# Altium PCB Signal Turn YBR Front.PcbDoc
Units mm, origin at the board's own origin, x right, y up, seen from the top; angles counter-clockwise.
Board outline 152.4 x 101.6 mm, 2 copper layers (Top Layer, Bottom Layer); 12 components, 11 nets, 24 pads, 6 vias.
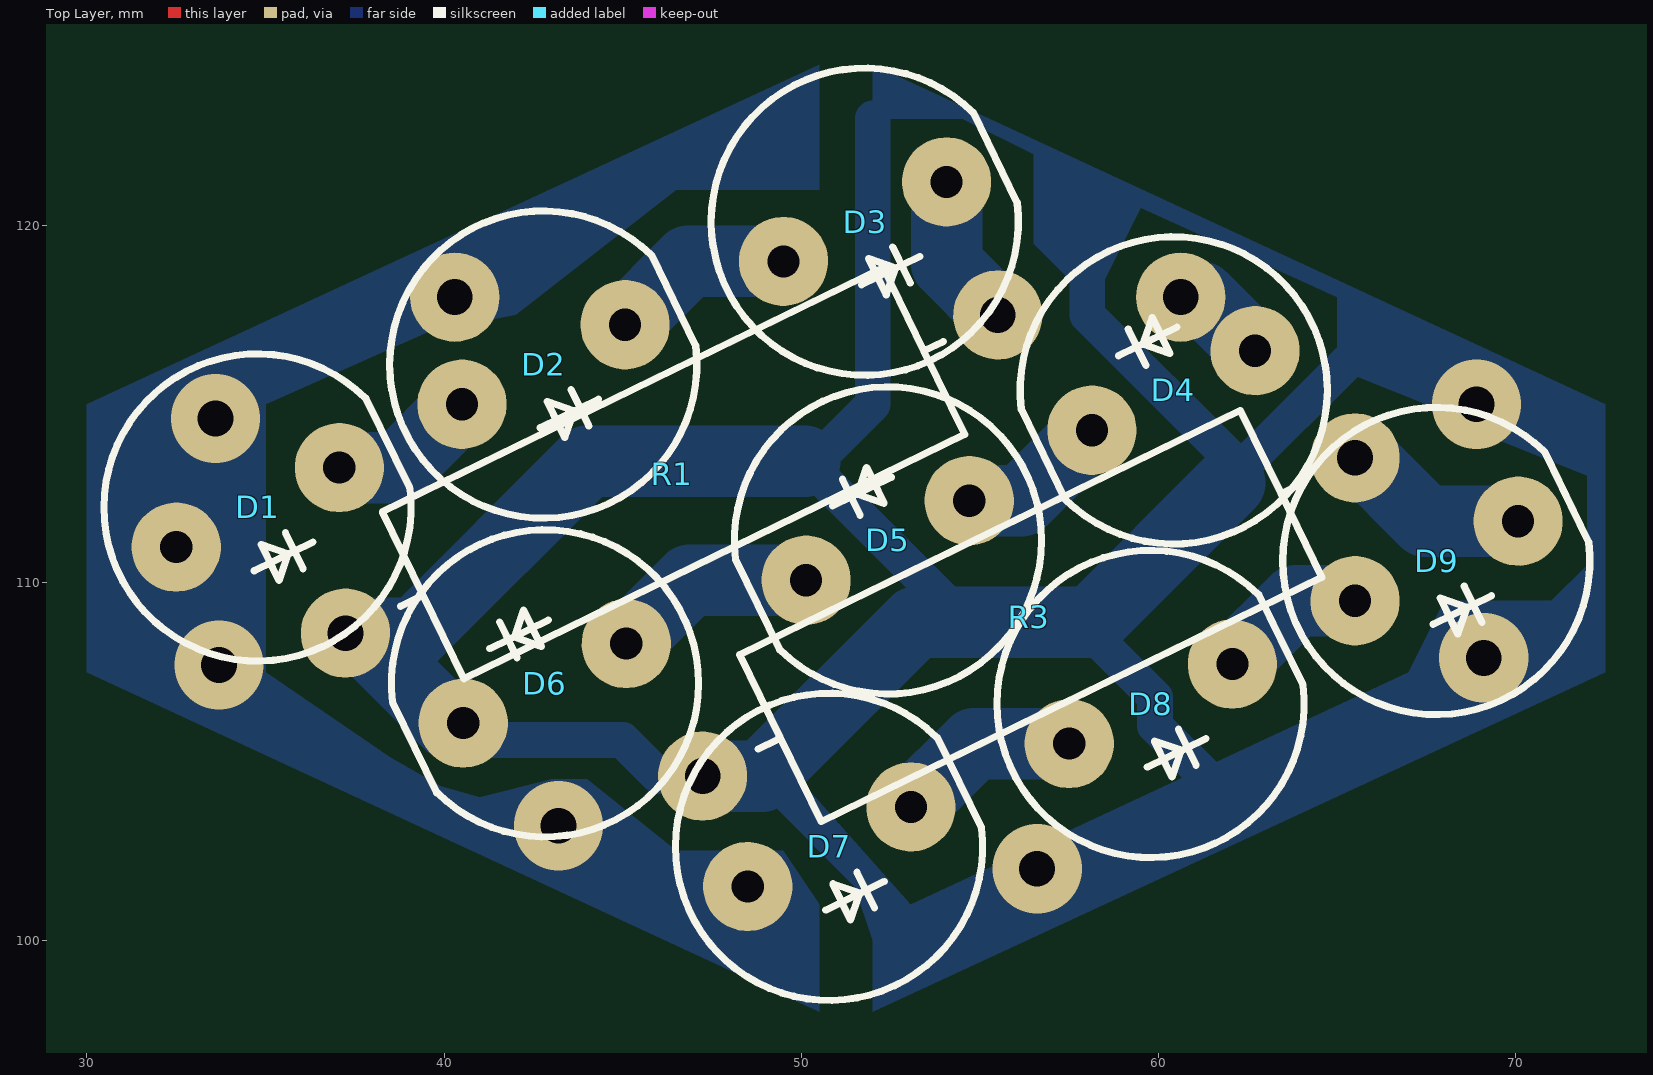
[diagram p0: Top Layer view]
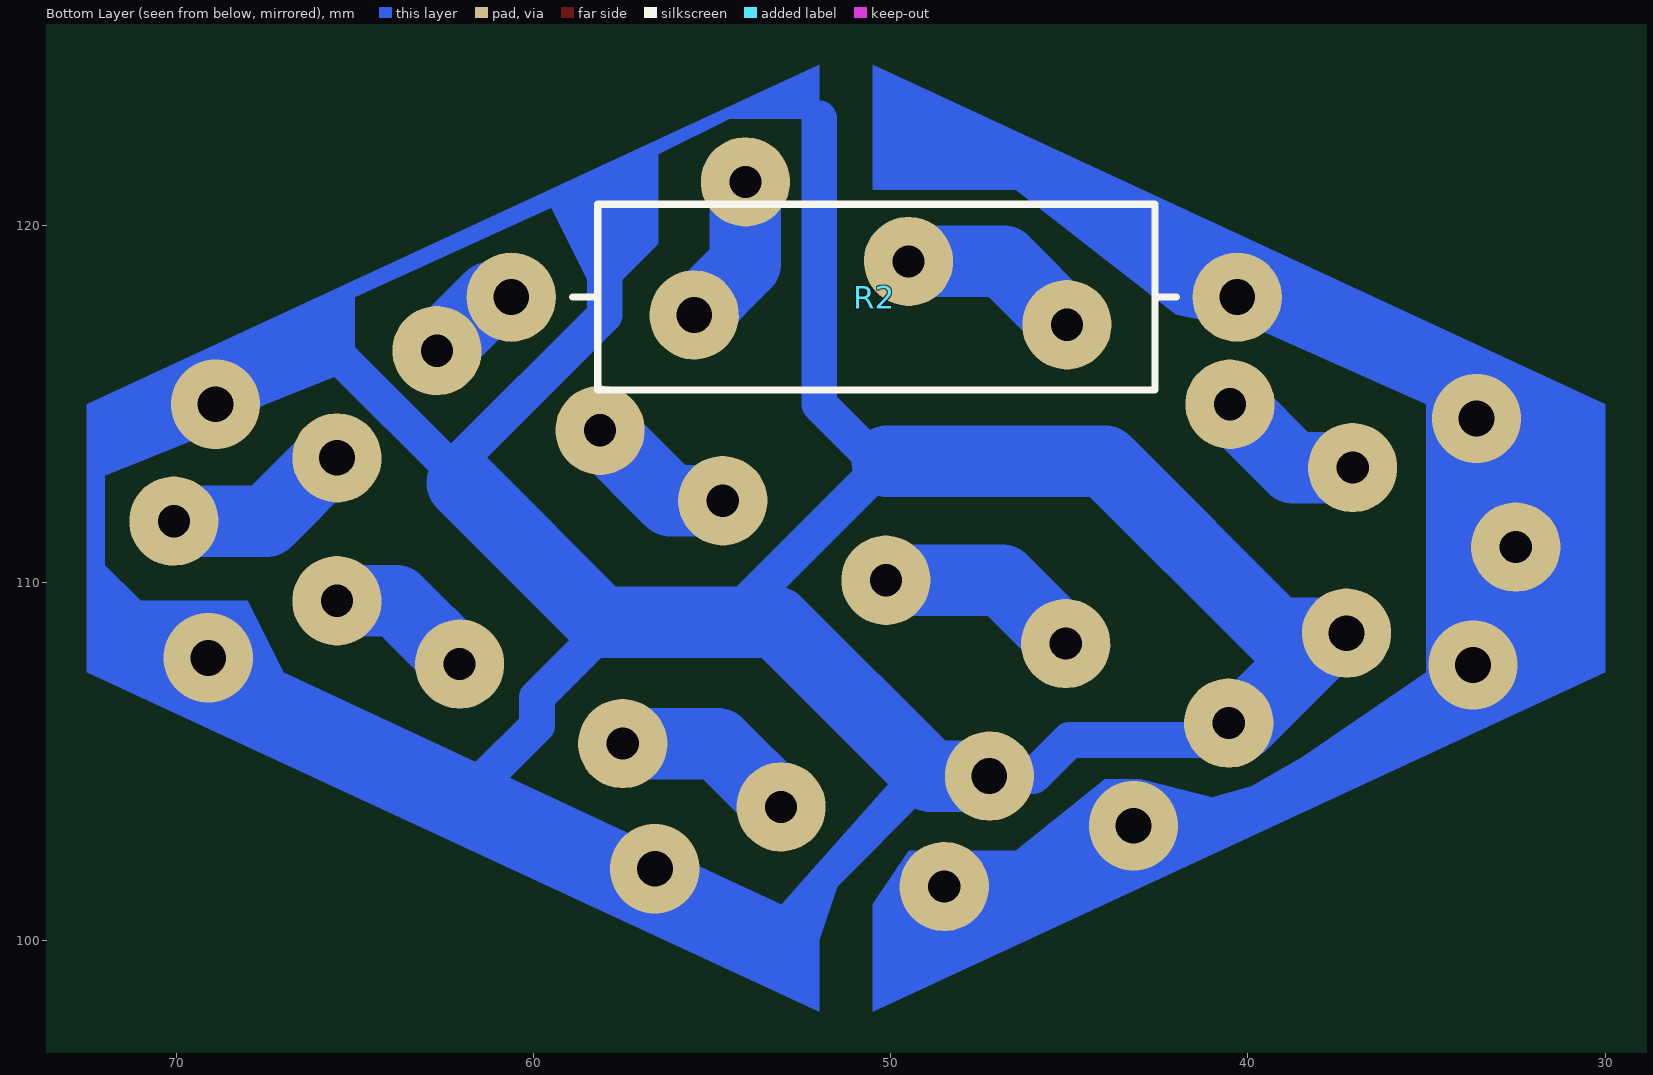
[diagram p1: Bottom Layer view, seen from below]
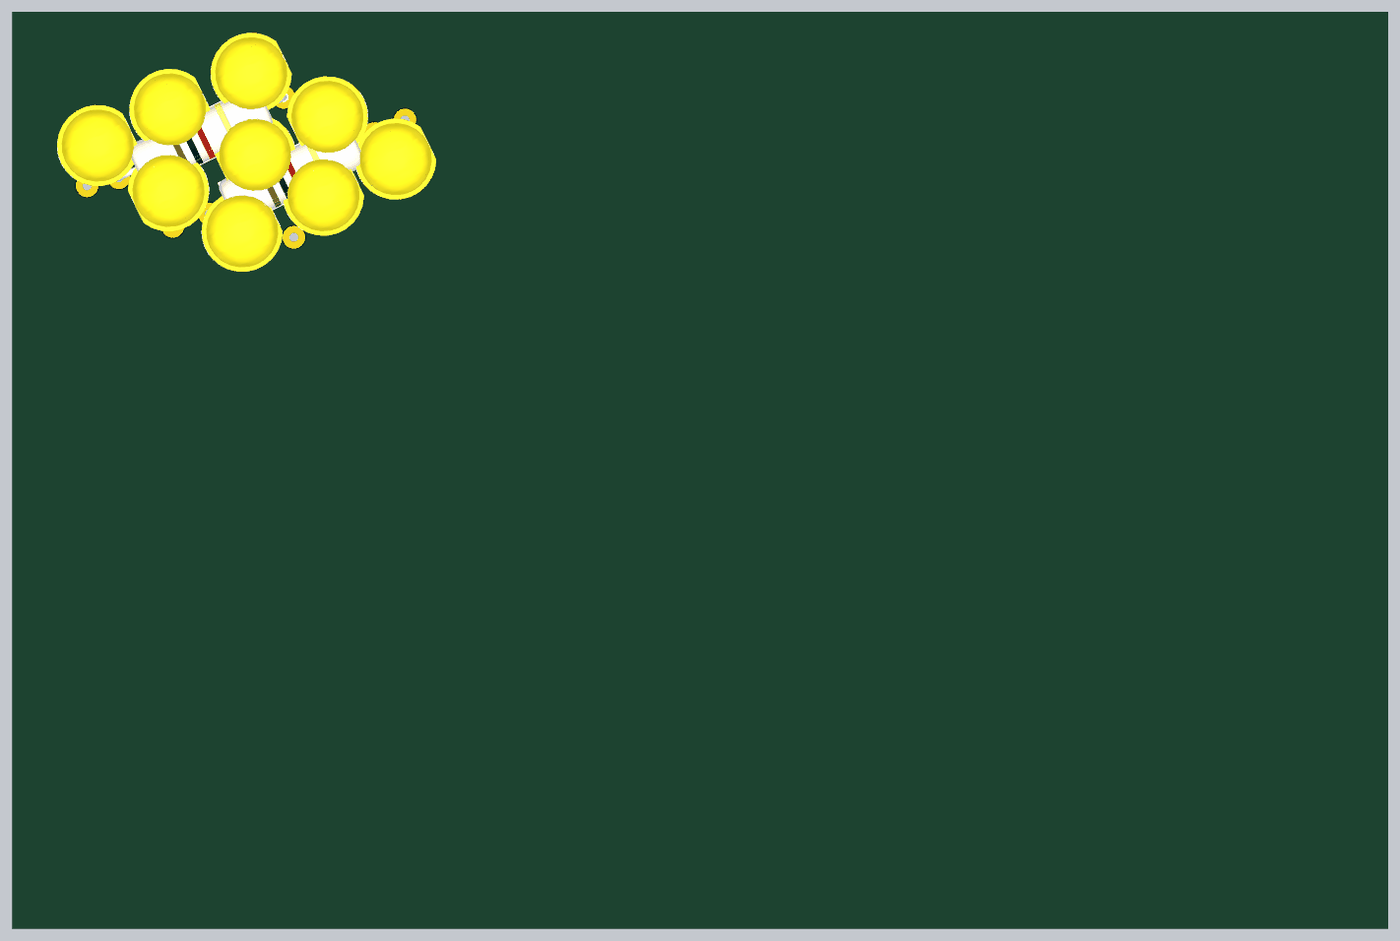
[diagram p2: 3D render of the assembled board from above, using the file's embedded part models]

## Layer stack, top to bottom
Top Solder: solder mask 0.0102, Solder Resist, Dk 3.5
Top Layer: signal copper 0.0356
Dielectric 1: dielectric 0.32, FR-4, Dk 4.8
Bottom Layer: signal copper 0.0356
Bottom Solder: solder mask 0.0102, Solder Resist, Dk 3.5

## Board outline
25.4,25.4 177.8,25.4 177.8,127 25.4,127

## Design rules (kind name [scope] priority, off if disabled: settings)
Clearance [All] p1: gap=0.254
ComponentClearance [All] p1: gap=0 collisioncheckmode=3 verticalgap=0 showdistances=FALSE
PolygonConnect [All] p1: connectstyle=Relief reliefconductorwidth=0.254 reliefentries=4 polygonreliefangle="90 Angle" airgapwidth=0.254
RoutingVias [All] p1: holewidth=0.711 width=1.27 viastyle="Through Hole" minholewidth=0.711 minwidth=1.27 maxholewidth=0.711 maxwidth=1.27
SolderMaskExpansion [All] p1: expansion=0.102
Width [All] p1: maxlimit=2 minlimit=1 preferedwidth=1
28 further rules are at their usual default settings.

## Components (designator, comment, footprint, x,y, rotation, side; value= is the part's Value field where it differs from the comment)
D1 "Yellow" "LED Round 8mm Yellow" 32.5,111 r26 top
D2 "Yellow" "LED Round 8mm Yellow" 40.5,115 r26 top
D3 "Yellow" "LED Round 8mm Yellow" 49.5,119 r26 top
D4 "Yellow" "LED Round 8mm Yellow" 62.7,116.5 r206 top
D5 "Yellow" "LED Round 8mm Yellow" 54.7,112.3 r206 top
D6 "Yellow" "LED Round 8mm Yellow" 45.1,108.3 r206 top
D7 "Yellow" "LED Round 8mm Yellow" 48.5,101.5 r26 top
D8 "Yellow" "LED Round 8mm Yellow" 57.5,105.5 r26 top
D9 "Yellow" "LED Round 8mm Yellow" 65.5,109.5 r26 top
R1 "Om" "Res p20.32 (9p) 2w" 55.5,117.5 r206 top
R2 "Om" "Res p20.32 (9p) 2w" 40.3,118 r0 bottom
R3 "Om" "Res p20.32 (9p) 2w" 65.5,113.5 r206 top

## Footprints (in the part's own frame and the unit in brackets; to place one, negate y for a bottom-side part, rotate by r counter-clockwise, add the part's x,y. Pads: shape width x height; smd on the part's side, far side on the other; paste and mask are expansions set on the pad)
"LED Round 8mm Yellow" [mm]
  round 2.5 hole 0.9: A(0,0) K(5.08,0)
  silkscreen extent -1.77,-4.3 6.6,4.3, body extent -1.85,-4.5 6.68,4.5, height 13
"Res p20.32 (9p) 2w" [mm] "L p20.32; horisontal"
  round 2.5 hole 1: 1(0,0) 2(20.32,0)
  silkscreen extent 1.7,-2.6 18.6,2.6, body extent -0.35,-2.75 20.67,2.75, height 5.5

## Part data
D1 D2 D3 D4 D5 D6 D7 D8 D9: library part "Led Round 8mm Yellow 0.5W", "2.8-3v 25mA, 4-5cd"
R1 R2 R3: library part "Res 2W", "5W Cement"

## Via types
v1: diameter 2.5, hole 1, Top Layer to Bottom Layer, 6 vias

## Nets (pads, with @x,y where several pads share a name; then routed paths per layer and width w, separated by ;. In a path a pad name is that pad's centre, name@x,y a point inside that pad or via, vN(x,y) a via of type N, cw(c..) or ccw(c..) an arc to the next point about the centre after c; other vN are vias at no path point)
GND: D6.K R1.2 R3.2 | length 79.4
  Bottom Layer w1: D6.K 41.007,105.6 45,105.6 46.008,104.592 R3.2 ; 50.1,113.4 54.1,109.4 ; 50.5,113.5 52,115 52,123 ; 58,121 58,117.5 62.1,113.4 ; 58.5,108.2 59.9,106.8 59.9,106 61.4,104.5 ; 62,112.9 65.6,116.5
  Bottom Layer w2: R1.2 R1.2@37.615,108.592 ; D6.K 40.134,106.073 R1.2@37.615,108.592 ; R3.2 48.892,104.592 53.2,108.9 58.1,108.9 62,112.8 ; 50.1,113.4 44,113.4 39.192,108.592 R1.2@37.615,108.592
  other v1: 56.6,102 69.1,107.9 68.9,115
NetD1_K: D1.K D2.A | length 4.2
  Bottom Layer w2: D1.K 38.727,113.227 D2.A
NetD2_K: D2.K D3.A | length 5.2
  Bottom Layer w2: D2.K 46.839,119 D3.A
NetD3_K: D3.K R1.1 | length 4.3
  Bottom Layer w2: D3.K 54.066,118.934 R1.1
NetD4_A: D4.A R2.2 | length 2.7
  Bottom Layer w2: R2.2 61.2,118 D4.A
NetD4_K: D4.K D5.A | length 4.3
  Bottom Layer w2: D5.A 56.161,112.3 D4.K
NetD5_K: D5.K D6.A | length 5.8
  Bottom Layer w2: D6.A 46.873,110.073 D5.K
NetD7_K: D7.K D8.A | length 5.2
  Bottom Layer w2: D7.K 54.839,105.5 D8.A
NetD8_K: D8.K D9.A | length 4.2
  Bottom Layer w2: D8.K 63.839,109.5 D9.A
NetD9_K: D9.K R3.1 | length 5.3
  Bottom Layer w2: R3.1 65.7,113.5 67.473,111.727 D9.K
VCC: D1.A D7.A R2.1
  other v1: 43.2,103.2 33.7,107.7 33.6,114.6

## Other copper
Bottom Layer:
  region net GND: 52,100 51.5,101.5 49,104 49.5,105 53.5,100.5
  region net GND: 72.5,107.5 72.5,115 71.9,115.2 67.5,115.2 67.5,115 69.5,114 72,113 72,110.5 71,109.5 68,109.5 67,107.5 67,107.3 72,107.3
  region net VCC: 30,115 30,107.5 30.7,107.3 35,107.2 35,115.2 30.7,115.2
  region net VCC: 30,107.5 50.5,98 50.5,101 49.5,102.5 46.5,102.5 44,104.5 43,104.5 41,104 39.9,104.3 38.5,105.1 35,107.5
  region net VCC: 50.5,121 50.5,124.5 30,115 35,115 39.5,117 42,117.5 46.5,121
  region net GND: 67.5,115 72.5,115 52,124.5 52,123 54.5,123 56.5,122 56.5,119.5 57.5,118.5 58.5,118.5 59.5,120.5 65,118 65,116
  region net GND: 52,100.5 67,107.5 72.5,107.5 52,98